# Altium PCB T_module.PcbDoc
Units mm, origin at the board's own origin, x right, y up, seen from the top; angles counter-clockwise.
Board outline 22 x 28 mm, 4 copper layers (Top Layer, Internal Plane 1, Internal Plane 2, Bottom Layer), stack 0.682 mm thick; 25 components, 30 nets, 170 pads, 112 vias.
Unrouted connection lines stored in the file: 35.
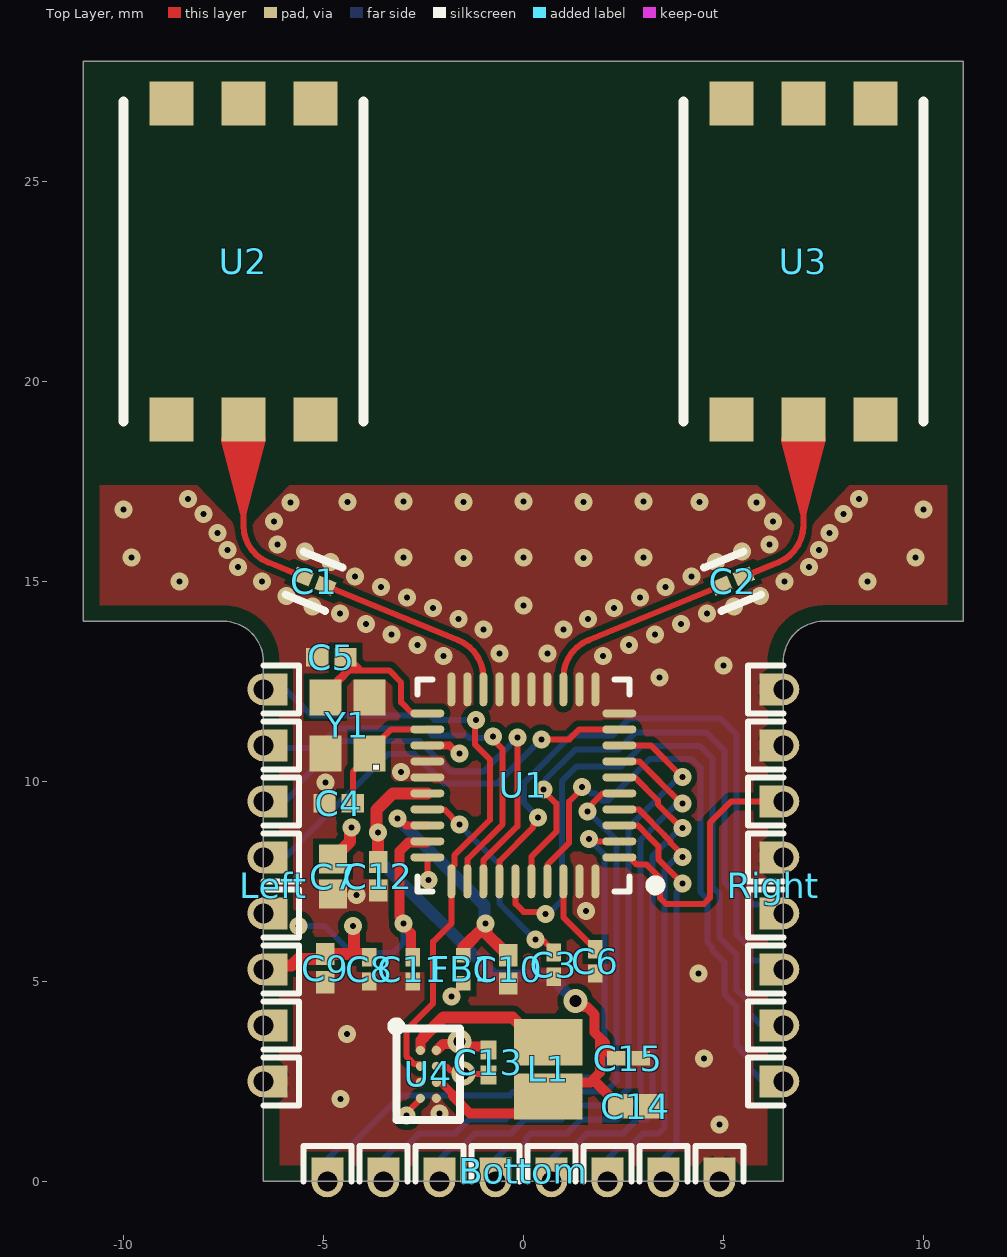
[diagram p0: Top Layer view]
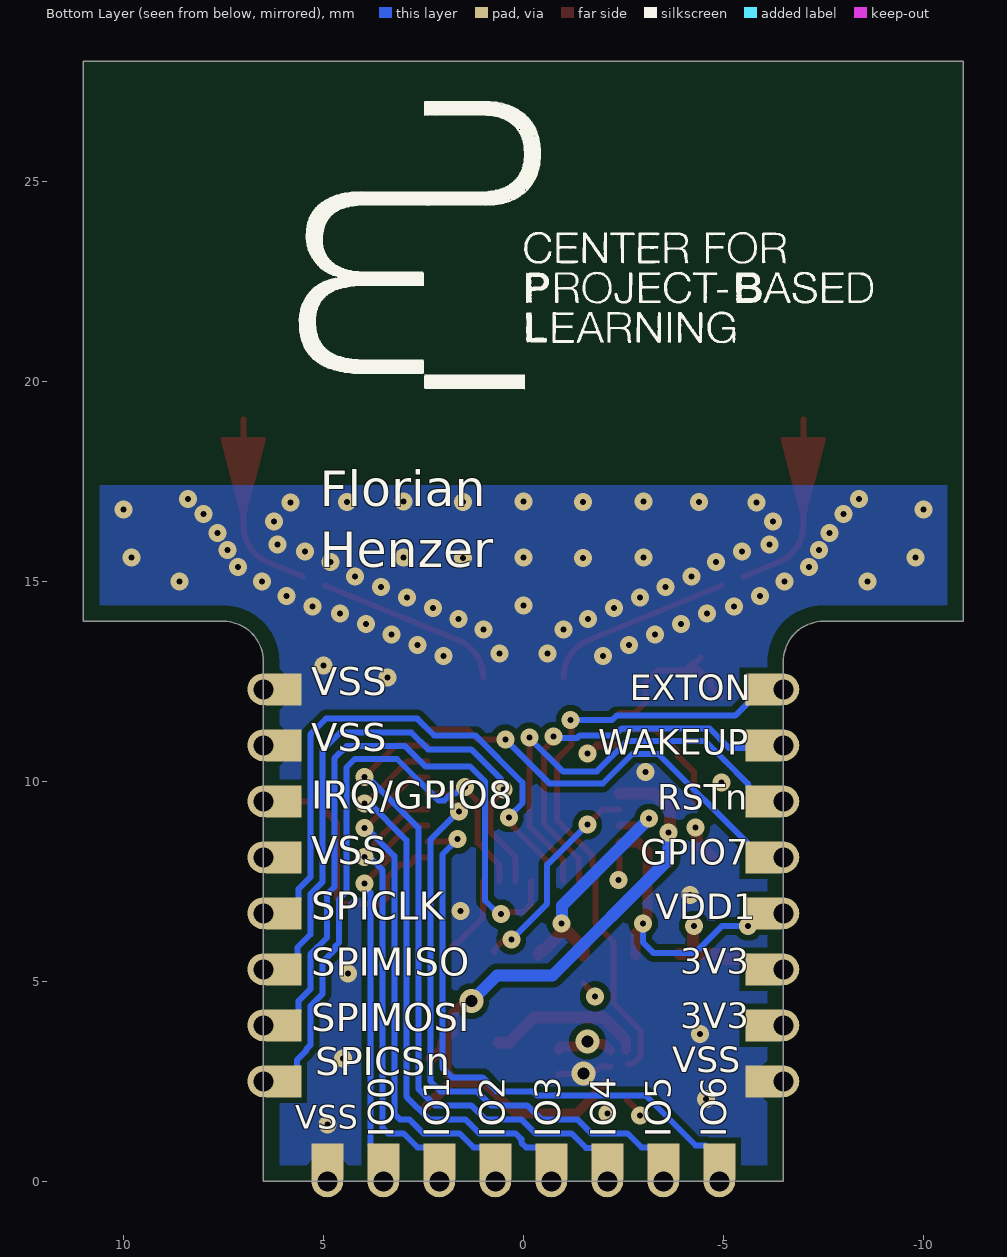
[diagram p1: Bottom Layer view, seen from below]
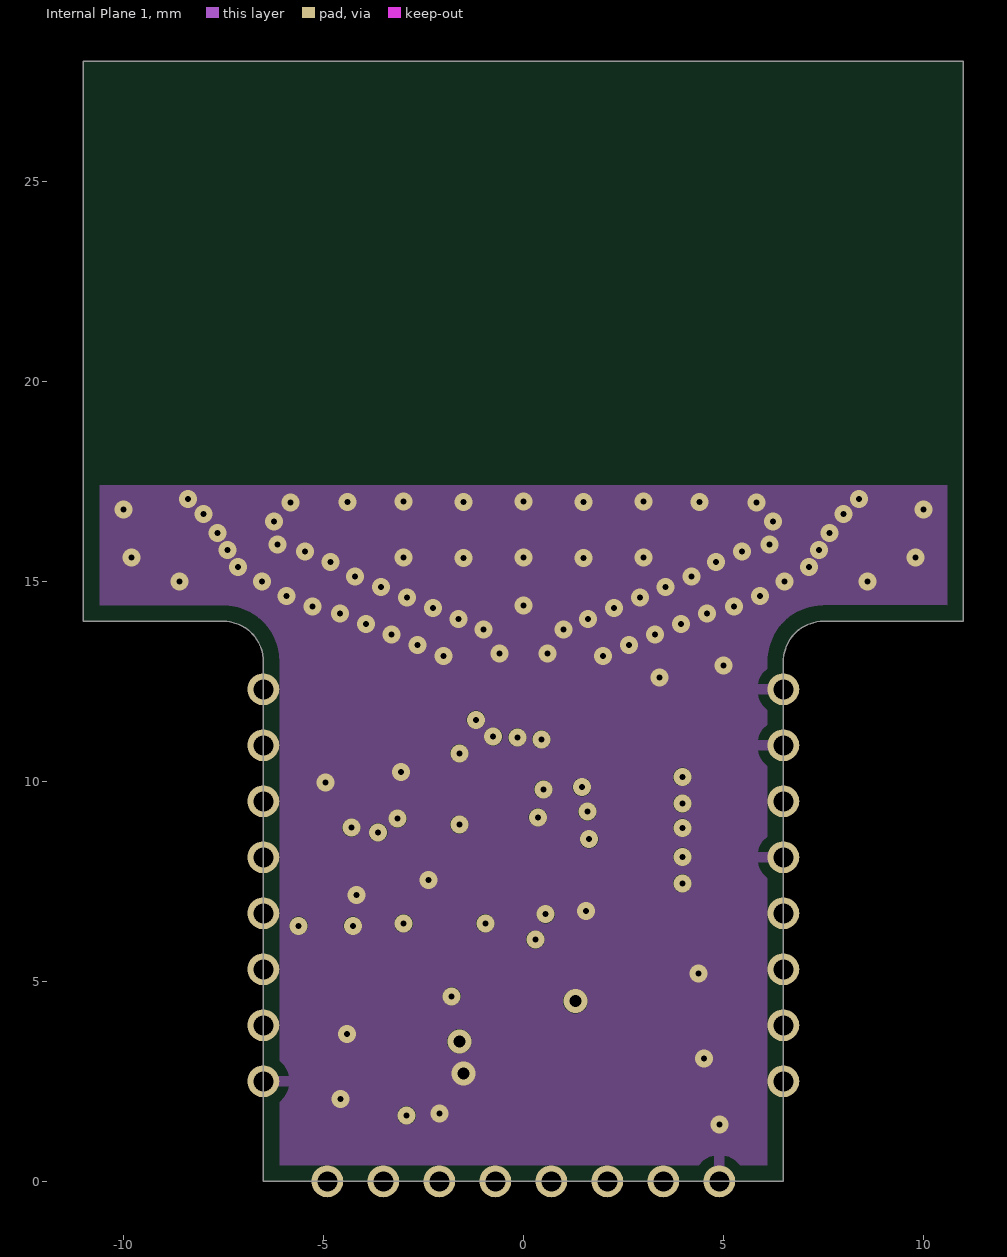
[diagram p2: Internal Plane 1]
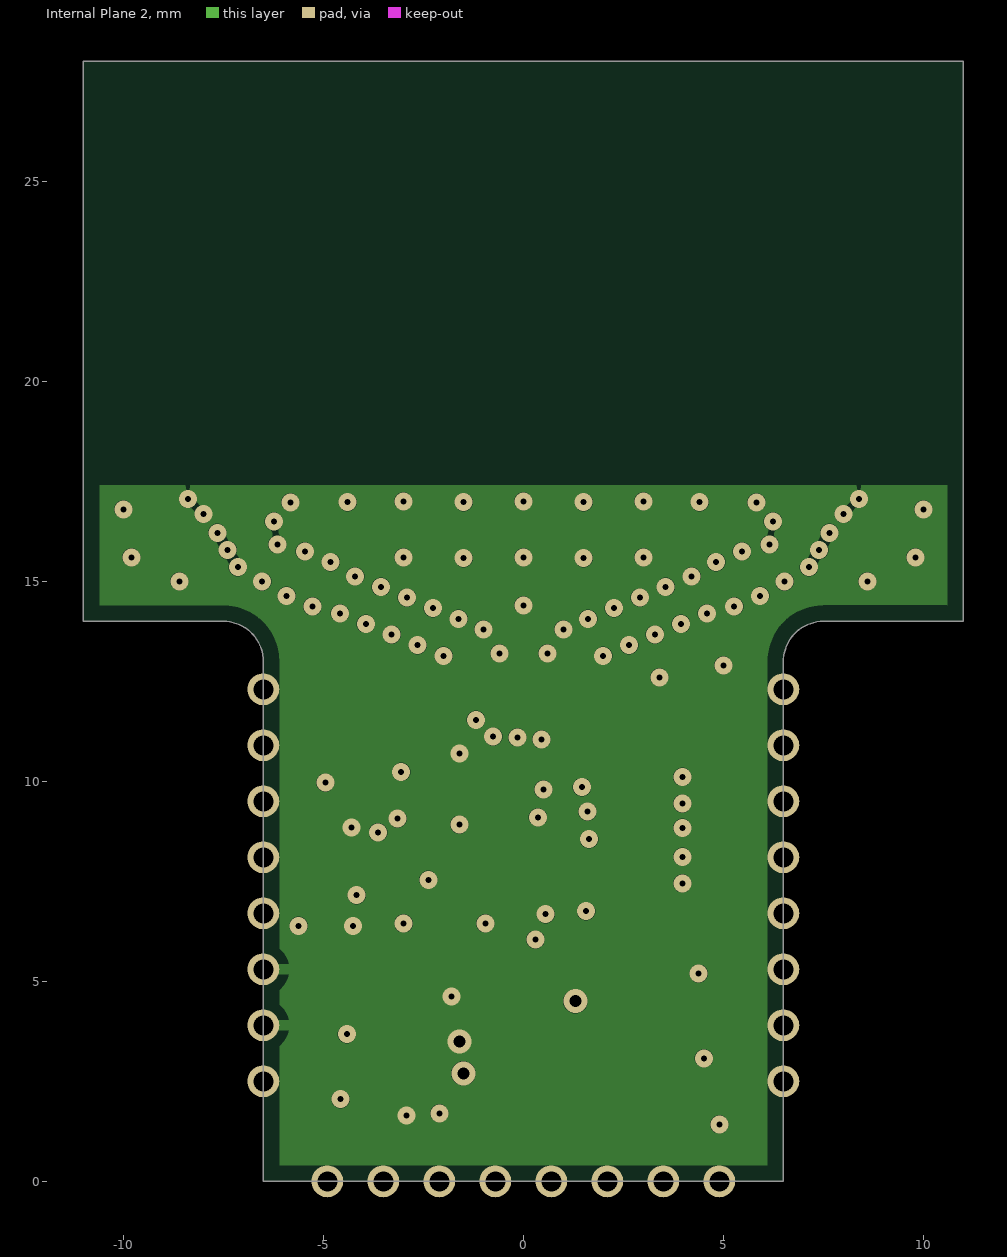
[diagram p3: Internal Plane 2]
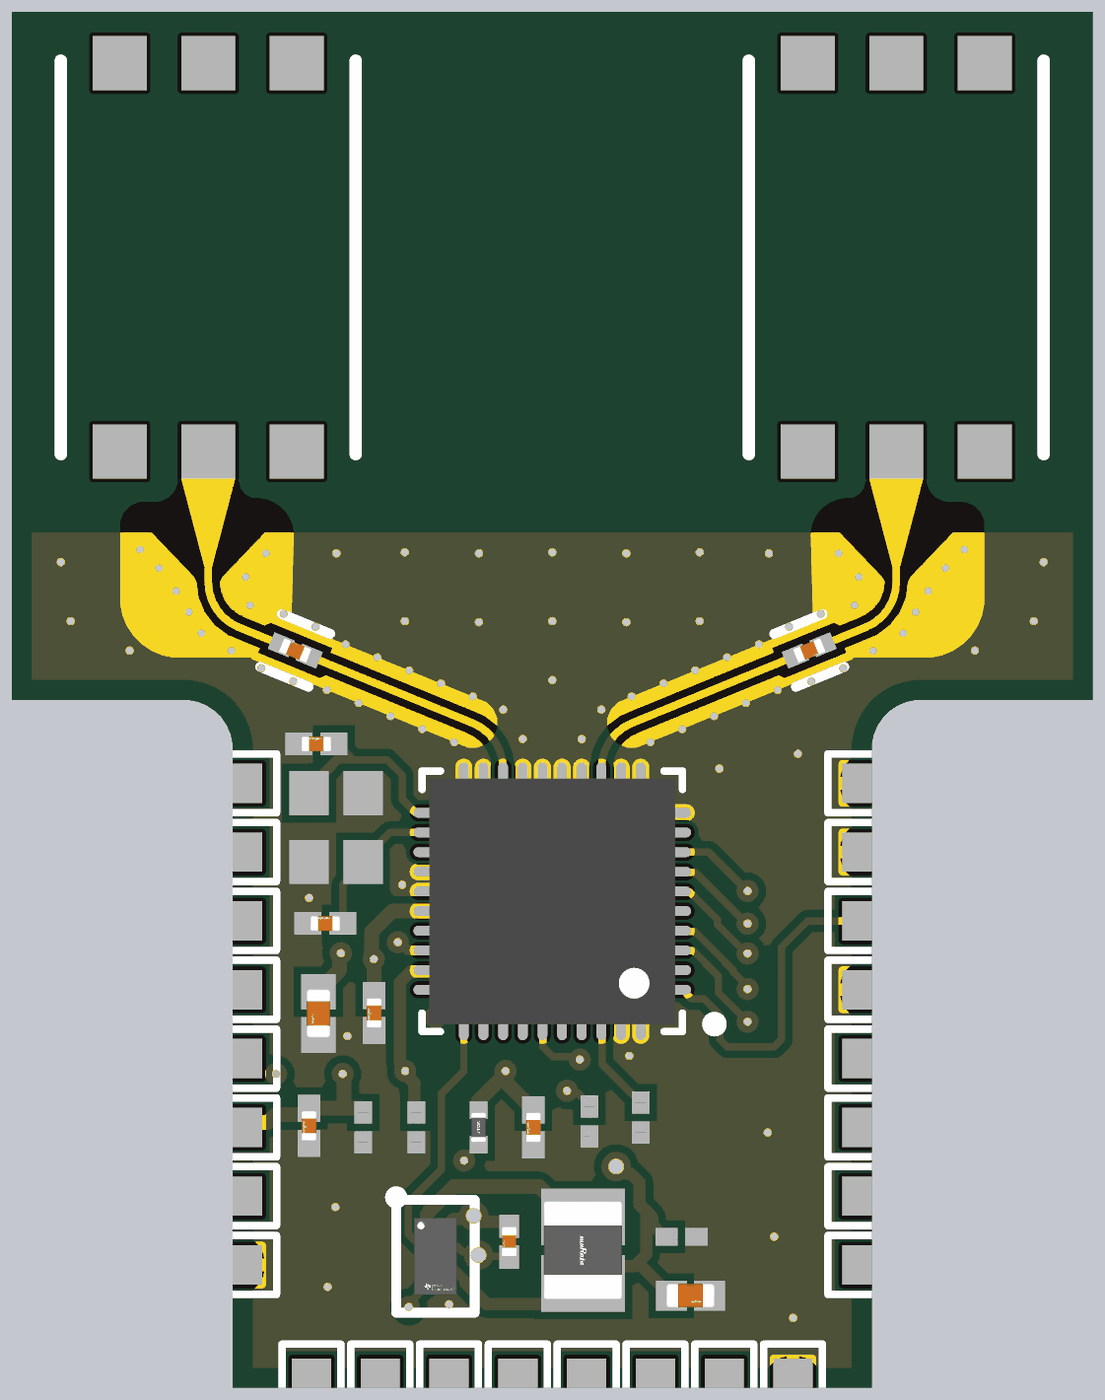
[diagram p4: 3D render of the assembled board from above, using the file's embedded part models]

## Layer stack, top to bottom
Top Solder: solder mask 0.0102, Solder Resist, Dk 3.5
Top Layer: signal copper 0.0356
Dielectric 1: dielectric 0.11, FR-4, Dk 4.65
Internal Plane 1: signal copper 0.0356
Dielectric2: dielectric 0.32, FR-4, Dk 4.65
Internal Plane 2: signal copper 0.0356
Dielectric3: dielectric 0.11, FR-4, Dk 4.65
Bottom Layer: signal copper 0.0356
Bottom Solder: solder mask 0.0102, Solder Resist, Dk 3.5

## Board outline
-6.5,13 ccw(c-7.5,13) -7.5,14 -11,14 -11,28 11,28 11,14 7.5,14 ccw(c7.5,13) 6.5,13 6.5,0 -6.5,0

## Design rules (kind name [scope] priority, off if disabled: settings)
BoardOutlineClearance [All] p1: gap=0 ignorepadtopadclearanceinfootprint=FALSE except(0.4: Poly-OutlineEdge)
Clearance [All] p1: gap=0.15 ignorepadtopadclearanceinfootprint=FALSE
HoleSize [All] p1: absolutevalues=TRUE maxlimit=2.54 minlimit=0.15 maxpercent=80.000 minpercent=20.000
MinimumSolderMaskSliver [All] p1: minsoldermaskwidth=0.1
PlaneClearance [All] p1: clearance=0.25
PlaneConnect PlaneConnect_1 [All] p1: planeconnectstyle=Direct reliefexpansion=0.508 reliefentries=4 reliefconductorwidth=0.254 reliefairgap=0.254
PolygonConnect PolygonConnect_1 [All] p1: thpad.connectstyle=Relief thpad.reliefconductorwidth=0.254 thpad.reliefentries=4 thpad.polygonreliefangle="90 Angle" thpad.airgapwidth=0.254 smdpad.connectstyle=Direct smdpad.reliefconductorwidth=0.254 smdpad.reliefentries=4 smdpad.polygonreliefangle="90 Angle" smdpad.airgapwidth=0.254 via.connectstyle=Direct via.reliefconductorwidth=0.254 via.reliefentries=4 via.polygonreliefangle="90 Angle" via.airgapwidth=0.254
RoutingVias RoutingVias_Power [(InNet('AVDD') OR InNet('GND') OR InNet('VDD') OR InNet('VCOM') OR InNet('EN_VDD3') OR InNet('VDD3') OR InNet('AVDD'))] p1: holewidth=0.3 width=0.6 viastyle="Through Hole" minholewidth=0.15 minwidth=0.45 maxholewidth=0.4 maxwidth=0.8
RoutingVias [All] p2: holewidth=0.3 width=0.6 viastyle="Through Hole" minholewidth=0.15 minwidth=0.45 maxholewidth=1 maxwidth=1.6
SilkToSilkClearance [All] p1: silktosilkclearance=0.01
SilkToSolderMaskClearance [IsPad] p1: minsilkscreentomaskgap=0.01 clearancetoexposedcopper=TRUE
SolderMaskExpansion SolderMaskExpansion_1 [IsVia] p1: expansion=0.102 istentingtop=TRUE
SolderMaskExpansion [All] p2: expansion=0.075 istentingtop=FALSE
Width RF [InNetClass('RF')] p1: maxlimit=0.2 minlimit=0.106 preferedwidth=0.153 // RF Impedance
Width Width_Power [(InNet('AVDD') OR InNet('GND') OR InNet('VDD') OR InNet('VCOM') OR InNet('EN_VDD3') OR InNet('VDD3') OR InNet('AVDD'))] p2: maxlimit=0.4 minlimit=0.2 preferedwidth=0.35
Width [All] p3: maxlimit=0.3 minlimit=0.1 preferedwidth=0.15
24 further rules are at their usual default settings.

## Classes and differential pairs
net class RF: NetC1_1 NetC1_2 NetC2_1 NetC2_2

## Components (designator, comment, footprint, x,y, rotation, side; value= is the part's Value field where it differs from the comment)
Bottom "Casellated Holes" "8 CASTELTED HOLES" -4.9,0 r0 top locked
C1 "GJM0335C1E2R0WB01D" FP-GJM033-0_03-IPC_B -5.23,15.004 r157.72 top locked
C2 "GJM0335C1E2R0WB01D" FP-GJM033-0_03-IPC_B 5.23,15.004 r22.28 top locked
C3 "CL03A224KQ3NNNC" FP-CL03-IPC_B 0.755,5.418 r270 top locked
C4 "GRM0335C1H3R3CA01D" FP-GRM033-0_03-IPC_A -4.619,9.449 r180 top locked
C5 "GRM0335C1H3R3CA01D" FP-GRM033-0_03-IPC_A -4.8,13.1 r180 top locked
C6 "CL03A104KQ3NNNH" FP-CL03-IPC_B 1.8,5.5 r90 top locked
C7 "GRM155R60J106ME47D" FP-GRM155-0_2-0_1-IPC_B -4.757,7.619 r270 top locked
C8 "CL03A104KQ3NNNH" FP-CL03-IPC_B -3.85,5.3 r90 top locked
C9 "GRM033R71A472KA01D" FP-GRM033-0_03-IPC_A -4.95,5.331 r270 top locked
C10 "GRM033R71A472KA01D" FP-GRM033-0_03-IPC_A -0.383,5.3 r270 top locked
C11 "CL03A104KQ3NNNH" FP-CL03-IPC_B -2.767,5.3 r270 top locked
C12 "GRM033R71A472KA01D" FP-GRM033-0_03-IPC_A -3.624,7.627 r270 top locked
C13 "GRM035R60J475ME15D" FP-GRM035-0_09-IPC_B -0.876,2.976 r270 top locked
C14 "GRM155R60J106ME47D" FP-GRM155-0_2-0_1-IPC_C 2.813,1.876 r0 top locked
C15 "CL03A104KQ3NNNH" FP-CL03-IPC_B 2.628,3.076 r180 top locked
FB1 "MPZ0603S330HT000" FP-MPZ0603-IPC_B -1.5,5.3 r90 top locked
L1 "1285AS-H-2R2M=P2" FP-DFE201610C-IPC_C 0.624,2.8 r270 top locked
Left "Casellated Holes" "8 Castelted holes" -6.5,12.3 r270 top locked
Right "Casellated Holes" "8 CASTELTED HOLES" 6.5,2.5 r90 top locked
U1 "DW3220" QFN40P500X500X40_HS-40N 0,9.9 r180 top locked
U2 "AH086M555003-T" AH086M -7,23 r0 top locked
U3 "AH086M555003-T" AH086M 7,23 r0 top locked
U4 "TPS62743YFPR" FP-YFP0008-C01-MFG -2.376,2.676 r0 top locked
Y1 "8Y38472012/10492148" "OSCSC320X250X100N - SMALL FOOTPRINT" -4.4,11.4 r90 top locked

## Footprints (in the part's own frame and the unit in brackets; to place one, negate y for a bottom-side part, rotate by r counter-clockwise, add the part's x,y. Pads: shape width x height; smd on the part's side, far side on the other; paste and mask are expansions set on the pad)
"8 CASTELTED HOLES" [mm]
  round 0.8 hole 0.5: 0(0,0) 1(1.4,0) 2(2.8,0) 3(4.2,0) 4(5.6,0) 5(7,0) 6(8.4,0) 7(9.8,0)
  rect 0.8x0.6 smd: 0(0,0.3) 1(1.4,0.3) 2(2.8,0.3) 3(4.2,0.3) 4(5.6,0.3) 5(7,0.3) 6(8.4,0.3) 7(9.8,0.3)
  rect 0.8x0.9 smd far side: 0(0,0.5) 1(1.4,0.5) 2(2.8,0.5) 3(4.2,0.5) 4(5.6,0.5) 5(7,0.5) 6(8.4,0.5) 7(9.8,0.5)
  silkscreen extent -0.6,0 10.4,0.89
"8 Castelted holes" [mm]
  rect 0.8x0.9 smd far side: 0(0,0.5) 1(1.4,0.5) 2(2.8,0.5) 3(4.2,0.5) 4(5.6,0.5) 5(7,0.5) 6(8.4,0.5) 7(9.8,0.5)
  rect 0.8x0.6 smd: 0(0,0.3) 1(1.4,0.3) 2(2.8,0.3) 3(4.2,0.3) 4(5.6,0.3) 5(7,0.3) 6(8.4,0.3) 7(9.8,0.3)
  round 0.8 hole 0.5: 0(0,0) 1(1.4,0) 2(2.8,0) 3(4.2,0) 4(5.6,0) 5(7,0) 6(8.4,0) 7(9.8,0)
  silkscreen extent -0.6,0 10.4,0.89
AH086M [mm] "RF ANT CHIP SLD"
  rect 1.1x1.1 smd: 1(0,-3.95) ""(-1.8,-3.95) ""(-1.8,3.95) ""(0,3.95) ""(1.8,-3.95) ""(1.8,3.95)
  silkscreen extent -3,-4 3,4, body extent -3,-4 3,4, height 1
FP-CL03-IPC_B [mm]
  rect 0.454x0.363 smd paste+0 mask+0: 1(-0.304,0) 2(0.304,0)
  body extent -0.68,-0.33 0.68,0.33, height 0.25
FP-DFE201610C-IPC_C [mm]
  rect 1.154x1.706 smd paste+0 mask+0: 1(-0.676,0) 2(0.676,0)
  body extent -1.35,-1 1.35,1, height 0.25
FP-GJM033-0_03-IPC_B [mm]
  rect 0.454x0.363 smd paste+0 mask+0: 1(-0.304,0) 2(0.304,0)
  silkscreen extent -0.53,-0.58 0.53,0.58, body extent -0.68,-0.33 0.68,0.33, height 0.25
FP-GRM033-0_03-IPC_A [mm]
  rect 0.554x0.463 smd paste+0 mask+0: 1(-0.354,0) 2(0.354,0)
  body extent -0.83,-0.43 0.83,0.43, height 0.25
FP-GRM035-0_09-IPC_B [mm]
  rect 0.477x0.403 smd paste+0 mask+0: 1(-0.313,0) 2(0.313,0)
  body extent -0.7,-0.35 0.7,0.35, height 0.25
FP-GRM155-0_2-0_1-IPC_B [mm]
  rect 0.728x0.706 smd paste+0 mask+0: 1(-0.439,0) 2(0.439,0)
  body extent -0.95,-0.5 0.95,0.5, height 0.25
FP-GRM155-0_2-0_1-IPC_C [mm]
  rect 0.628x0.606 smd paste+0 mask+0: 1(-0.389,0) 2(0.389,0)
  body extent -0.8,-0.45 0.8,0.45, height 0.25
FP-MPZ0603-IPC_B [mm]
  rect 0.363x0.363 smd paste+0 mask+0: 1(-0.35,0) 2(0.35,0)
  body extent -0.68,-0.33 0.68,0.33, height 0.25
FP-YFP0008-C01-MFG [mm]
  round 0.23 smd paste-1000 mask+0: A1(-0.2,0.6) A2(0.2,0.6) B1(-0.2,0.2) B2(0.2,0.2) C1(-0.2,-0.2) C2(0.2,-0.2) D1(-0.2,-0.6) D2(0.2,-0.6)
  silkscreen extent -0.9,-1.15 0.8,1.3, body extent -0.95,-1.3 0.95,1.3, height 0.25
"OSCSC320X250X100N - SMALL FOOTPRINT" [mm]
  rect 0.9x0.8 smd mask+0: 1(-0.7,-0.55) 2(0.7,-0.55) 3(0.7,0.55) 4(-0.7,0.55)
  body extent -1,-0.8 1,0.8, height 0.5
QFN40P500X500X40_HS-40N [mm] "QFN, 40-Leads, Body 5x5mm, Pitch 0.4mm, IPC Medium Density"
  oval 0.85x0.2 smd: 1(-2.4,1.8) 2(-2.4,1.4) 3(-2.4,1) 4(-2.4,0.6) 5(-2.4,0.2) 6(-2.4,-0.2) 7(-2.4,-0.6) 8(-2.4,-1) 9(-2.4,-1.4) 10(-2.4,-1.8) 21(2.4,-1.8) 22(2.4,-1.4) 23(2.4,-1) 24(2.4,-0.6) 25(2.4,-0.2) 26(2.4,0.2) 27(2.4,0.6) 28(2.4,1) 29(2.4,1.4) 30(2.4,1.8)
  oval 0.2x0.85 smd: 11(-1.8,-2.4) 12(-1.4,-2.4) 13(-1,-2.4) 14(-0.6,-2.4) 15(-0.2,-2.4) 16(0.2,-2.4) 17(0.6,-2.4) 18(1,-2.4) 19(1.4,-2.4) 20(1.8,-2.4) 31(1.8,2.4) 32(1.4,2.4) 33(1,2.4) 34(0.6,2.4) 35(0.2,2.4) 36(-0.2,2.4) 37(-0.6,2.4) 38(-1,2.4) 39(-1.4,2.4) 40(-1.8,2.4)
  silkscreen extent -3.43,-2.65 2.65,2.65, body extent -2.5,-2.5 2.5,2.5, height 0.5

## Part data
C1 C2: library part CMP-2010-00751-2, "Ceramic Capacitor 2pF ±0.05pF 25V C0G 0201 (0603 Metric)", Capacitance=2pF, Case Code (Imperial)=0201, Case Code (Metric)=0603, Dielectric=C0G, Max Operating Temperature=125°C, Min Operating Temperature=-55°C, Package Quantity=15000, Voltage Rating=25V, Case/Package=0201, Depth=0.3mm, Height=0.3mm, Length=0.6mm, Mount="Surface Mount", Packaging="Tape and Reel", Radiation Hardening=No, Termination=SMD/SMT, Thickness=0.013inch, Voltage Rating (DC)=25V, Width=0.012inch
C3: library part CMP-2010-00678-2, "Cap Ceramic 220nF 6.3V X5R ±10% Pad SMD 0201 +85°C T/R", Capacitance=220nF, Case Code (Imperial)=0201, Case Code (Metric)=0603, Dielectric=X5R, Max Operating Temperature=85°C, Min Operating Temperature=-55°C, Tolerance=10%, Voltage Rating=6.3V, Case/Package=0201, Contact Plating=Tin, Depth=0.3mm, Height=0.3mm, Length=0.6mm, Mount="Surface Mount", Packaging="Tape and Reel", Radiation Hardening=No, Thickness=0.013inch, Width=0.012inch
C4 C5: library part CMP-2010-01116-2, "Chip Multilayer Ceramic Capacitors for General Purpose, 0201, 3.3pF, C0G, 30ppm/°C, 0.25pF, 50V", Capacitance=3.3pF, Case Code (Imperial)=0201, Case Code (Metric)=0603, Dielectric=C0G, Max Operating Temperature=125°C, Min Operating Temperature=-55°C, Package Quantity=1, Voltage Rating=50V, Case/Package=0201, Depth=0.3mm, Lead Free="Lead Free", Length=0.024inch, Mount="Surface Mount", Packaging="Tape and Reel", Termination=SMD/SMT, Thickness=0.013inch, Voltage Rating (DC)=50V, Width=0.012inch
C6 C8 C11 C15: library part CMP-13271-001518-1, "Cap Ceramic 100nF 6.3V X5R ±10% Pad SMD 0201 +85°C T/R", Capacitance=100nF, Case Code (Imperial)=0201, Case Code (Metric)=0603, Dielectric=X5R, Max Operating Temperature=85°C, Min Operating Temperature=-55°C, Package Quantity=15000, Tolerance=10%, Voltage Rating=6.3V, Case/Package=0201, Depth=0.3mm, Height=0.3mm, Length=0.6mm, Mount="Surface Mount", Packaging="Tape and Reel", Radiation Hardening=No, Thickness=0.013inch, Width=0.012inch
C7 C14: library part CMP-06035-022355-1, "Chip Multilayer Ceramic Capacitors for General Purpose, 0402, 10uF, X5R, 15%, 20%, 6.3V", Capacitance=10uF, Case Code (Imperial)=0402, Case Code (Metric)=1005, Dielectric=X5R, Max Operating Temperature=85°C, Min Operating Temperature=-55°C, Tolerance=20%, Voltage Rating=6.3V, Case/Package=0402, Length=0.039inch, Mount="Surface Mount", Packaging="Tape and Reel", Thickness=0.024inch, Voltage Rating (DC)=6.3V, Width=0.02inch
C9 C10 C12: library part CMP-2010-01686-2, "Chip Multilayer Ceramic Capacitors for General Purpose, 0201, 4700pF, X7R, 15%, 10%, 10V", Capacitance=4.7nF, Case Code (Imperial)=0201, Case Code (Metric)=0603, Dielectric=X7R, Max Operating Temperature=125°C, Min Operating Temperature=-55°C, Package Quantity=1, Tolerance=10%, Voltage=10V, Case/Package=0201, Depth=0.3mm, Height=0.3mm, Lead Free="Lead Free", Length=0.6mm, Material=Ceramic, Mount="Surface Mount", Packaging="Tape and Reel", Radiation Hardening=No, REACH SVHC="No SVHC", Termination=SMD/SMT, Thickness=0.013inch, Voltage Rating=10V, Voltage Rating (DC)=10V, Width=0.012inch
C13: library part CMP-06035-019701-1, "Chip Multilayer Ceramic Capacitors for General Purpose, 0201, 4.7uF, X5R, 15%, 20%, 6.3V", Capacitance=4.7uF, Case Code (Imperial)=0201, Case Code (Metric)=0603, Dielectric=X5R, Max Operating Temperature=85°C, Min Operating Temperature=-55°C, Tolerance=20%, Voltage Rating=6.3V, Case/Package=0201, Length=0.024inch, Mount="Surface Mount", Packaging="Tape and Reel", Thickness=0.022inch, Voltage Rating (DC)=6.3V, Width=0.012inch
FB1: library part CMP-08257-000038-1, "CHIP BEADS FOR GENERAL SIGNAL LI", Case Code (Imperial)=0201, Case Code (Metric)=0603, DC Resistance (DCR)=50mR, Max Current Rating=1.6A, Max Operating Temperature=125°C, Min Operating Temperature=-55°C, Case/Package=0201, Mount="Surface Mount", Number of Lines=1, Packaging="Cut Tape", RoHS Compliant=Yes
L1: library part CMP-06042-000201-1, "Shielded Wirewound Inductor 2.2uH 20% 1200mA 0.204Ω 0806 (2016)", Case Code (Imperial)=0805, Case Code (Metric)=2012, Current Rating=1.5A, DC Resistance (DCR)=204mR, Inductance=2.2uH, Max DC Current=1.2A, Max Operating Temperature=85°C, Min Operating Temperature=-40°C, Resistor Type=Wirewound, Test Frequency=1MHz, Tolerance=20%, Case/Package=0805, Core Material=Ferrite, Depth=1.6mm, Height - Seated (Max)=0.039inch, Length=0.079inch, Mount="Surface Mount", Packaging="Tape and Reel", Shielding=Shielded, Width=0.063inch
U1: library part CMP-01416-1, "Ultra-low power Wi-Fi 802.11b/g/n, without mounted antenna", Manufacturer=Qorvo, Package Type=QFN, Package(mm)="5 x 5", Voltage(V)="2.4 to 3.6", 802.15 Standards="4a, 4z-BPRF", Angle of Arrival(degrees)="< 5", Antenna Ports(#)=2, BOM Ext Components(#)=10, Data Rate="850 kbps, 6.8 Mbps", Interface=SPI, MCU=External, Part # Aliases=DWM3000, PDoA Support=Yes, Product Type="RF Transceiver", Ranging Accuracy(cm)="< 10", Security Features="4z Compliant + AES", Series=DWM3000, Subcategory="Wireless & RF Integrated Circuits", UWB Channels="5, 9"
U2 U3: library part CMP-00997-1, "3.5GHz, 5.6GHz WiMax™ Chip RF Antenna 3.1GHz ~ 8GHz 2.6dBi, 0.7dBi Solder Surface Mount", Frequency=5.55GHz, Max Frequency=8GHz, Max Operating Temperature=80°C, Min Operating Temperature=-20°C, Package Quantity=1, Height=0.039inch, Impedance=50R, Length=8mm, Mount="Surface Mount", Number of Bands=1, Packaging="Tape and Reel", Radiation Hardening=No, REACH SVHC=Unknown, Termination=Solder, Width=6mm
U4: library part CMP-04918-000507-1, "IC REG BUCK PROG 300MA 8DSBGA", Max Input Voltage=5.5V, Max Operating Temperature=85°C, Max Output Voltage=3.3V, Min Input Voltage=2.15V, Min Operating Temperature=-40°C, Min Output Voltage=1.2V, Output Current=300mA, Quiescent Current=300nA, Switching Frequency=1.2MHz, Lead Free="Lead Free", Mount="Surface Mount", Number of Outputs=1, Output Configuration=Positive, Packaging="Tape and Reel", RoHS Compliant=Yes, Synchronous Rectifier=Yes
Y1: library part ABM8G-14.31818MHZ-B4Y-T, "Crystal 20MHz Ã‚Â±20ppm (Tol) Ã‚Â±30ppm (Stability) 18pF FUND 80Ohm 4-Pin Mini-CSMD T/R / https://www.digikey.ch/de/products/detail/txc-corporation/8Y38472012/10492148", Package=None, Availability=Unavailable, MP=8Y38472012/10492148, Price=None

## Via types
v1: diameter 0.45, hole 0.15, Top Layer to Bottom Layer, tented both sides, 109 vias
v2: diameter 0.6, hole 0.3, Top Layer to Bottom Layer, tented both sides, 3 vias

## Nets (pads, with @x,y where several pads share a name; then routed paths per layer and width w, separated by ;. In a path a pad name is that pad's centre, name@x,y a point inside that pad or via, vN(x,y) a via of type N, cw(c..) or ccw(c..) an arc to the next point about the centre after c; other vN are vias at no path point)
3V3: C7.1 C8.2 C9.1 C13.1 FB1.1 Left.5 Left.6 U1.23 U4.A2 U4.D1 | length 7.9
  Top Layer w0.15: v1(-2.92,1.648) -2.92,1.711 -2.576,2.054 U4.D1 ; v1(-1.793,4.625) -1.793,4.657 FB1.1
  Top Layer w0.2: U1.23 -2.075,10.9 -2.065,10.89 -1.842,10.89 -1.652,10.7 v1(-1.6,10.7)
  Top Layer w0.25: U4.A2@-2.168,3.276 -2.005,3.439 -1.761,3.439 -1.757,3.443 -1.657,3.443 v2(-1.6,3.5) ; v2@-1.6,3.6 -1.6,3.581 -1.396,3.378 -0.928,3.378 -0.876,3.326 C13.1
  Top Layer w0.3: Left.5@-6.5,5.3 -6.404,5.396 -5.794,5.396 -5.631,5.559 -5.031,5.559 -4.948,5.642 -4.948,5.688 -4.236,5.688 ; C7.1 -4.757,8.069 -4.33,8.496 -4.33,8.814 v1(-4.301,8.843) ; v1(-4.264,6.388) -4.236,6.359 -4.236,5.688 ; C8.2@-3.906,5.688 -4.236,5.688
EXTON: Left.0 U1.31 U4.B1 | length 15.5
  Top Layer w0.15: U4.B1@-2.603,2.93 -2.725,2.93 -2.823,3.028 -2.926,3.131 -2.926,3.778 -2.253,4.45 -2.253,5.992 -1.8,6.445 U1.31 -1.8,7.839 -1.725,7.914 -1.725,8.15 -0.84,9.035 -0.84,10.552 -1.204,10.917 -1.204,11.518 v1(-1.184,11.537)
  Bottom Layer w0.15: Left.0@-6.5,12.3 -6,12.3 -5.95,12.3 -5.295,11.645 -2.327,11.645 -2.219,11.537 v1(-1.184,11.537)
GPIO0: Bottom.6 U1.3 | length 10
  Top Layer w0.15: U1.3 2.41,8.89 2.869,8.89 3.126,8.633 3.126,8.626 3.384,8.369 3.384,8.04 v1(3.975,7.449)
  Bottom Layer w0.15: Bottom.6@3.5,0 3.5,0.55 3.825,0.875 3.825,7.218 3.975,7.368 v1(3.975,7.449)
GPIO1: Bottom.5 U1.4 | length 11.4
  Top Layer w0.15: U1.4 2.41,9.29 2.893,9.29 3.525,8.659 3.525,8.652 3.684,8.493 3.684,8.459 3.904,8.239 3.974,8.239 v1@3.975,8.24
  Bottom Layer w0.15: Bottom.5@2.1,0 2.1,0.55 2.4,0.85 2.646,0.85 2.996,1.2 3.389,1.2 3.525,1.336 3.525,7.79 v1@3.975,8.24
  other v1: 3.975,8.114
GPIO2: Bottom.4 U1.6 | length 13.2
  Top Layer w0.15: U1.6 2.41,10.09 2.794,10.09 3.363,9.522 3.363,9.421 3.945,8.838 v1(3.975,8.838)
  Bottom Layer w0.15: Bottom.4@0.7,0 0.7,0.55 1,0.85 1.246,0.85 1.596,1.2 2.501,1.2 2.851,1.55 3.089,1.55 3.225,1.686 3.225,8.131 3.933,8.838 v1(3.975,8.838)
GPIO3: Bottom.3 U1.7 | length 14.6
  Top Layer w0.15: U1.7 2.41,10.49 2.909,10.49 3.41,9.989 3.41,9.984 v1@3.894,9.5
  Bottom Layer w0.15: Bottom.3@-0.7,0 -0.7,0.55 -0.4,0.85 -0.067,0.85 0.05,0.967 0.05,1.054 0.196,1.2 1.101,1.2 1.451,1.55 2.357,1.55 2.925,2.118 2.925,8.53 v1@3.895,9.5
  other v1: 3.975,9.445
GPIO4: Bottom.2 U1.8 | length 16.3
  Top Layer w0.15: U1.8 3.185,10.9 v1(3.975,10.11)
  Bottom Layer w0.15: Bottom.2@-2.1,0 -2.1,0.539 -1.8,0.839 -1.565,0.839 -1.204,1.2 -0.299,1.2 0.051,1.55 0.957,1.55 1.306,1.9 2.212,1.9 2.625,2.313 2.625,8.841 3.766,9.982 3.894,10.11 v1(3.975,10.11)
GPIO5: Bottom.1 U1.5 | length 15.3
  Top Layer w0.15: v1(1.603,9.243) 1.603,9.318 1.733,9.447 1.733,9.452 1.98,9.7 U1.5
  Bottom Layer w0.15: Bottom.1@-3.5,0 -3.5,0.55 -3.2,0.85 -2.954,0.85 -2.604,1.2 -1.699,1.2 -1.349,1.55 -0.443,1.55 -0.093,1.9 0.812,1.9 1.162,2.25 2.067,2.25 2.325,2.508 2.325,8.544 1.626,9.243 v1(1.603,9.243)
GPIO6: Bottom.0 U1.2 | length 15.4
  Top Layer w0.15: v1(1.643,8.554) 1.71,8.554 1.765,8.5 U1.2
  Bottom Layer w0.15: Bottom.0@-4.9,0 -4.675,0.225 -4.675,0.5 -4.9,0.5 -4.9,0.55 -4.55,0.9 -4.304,0.9 -3.054,2.15 -0.338,2.15 -0.238,2.25 0.667,2.25 1.017,2.6 1.783,2.6 2.025,2.842 2.025,8.172 v1(1.643,8.554)
GPIO7: Left.3 U1.9 | length 10.8
  Top Layer w0.15: v1(0.451,11.049) 1.148,11.049 1.399,11.3 U1.9
  Bottom Layer w0.15: Left.3@-6.5,8.1 -5.95,8.1 -5.625,8.425 -5.625,8.436 -3.376,10.685 -2.725,10.685 -1.99,9.95 -0.648,9.95 v1(0.451,11.049)
IRQ/GPIO8: Right.5 U1.1 | length 7.1
  Top Layer w0.15: U1.1 2.711,8.1 2.735,8.077 2.735,8.019 2.838,7.916 3.084,7.916 3.41,7.59 3.41,7.09 3.56,6.94 4.515,6.94 4.663,7.087 4.663,8.963 5.2,9.5 6.2,9.5 Right.5@6.5,9.5
NetC1_1: C1.1 U1.18 | length 4.8
  Top Layer w0.154: C1.1@-4.952,14.89 C1.1 -1.621,13.525 cw(c-2,12.6) U1.18@-1,12.6
NetC1_2: C1.2 U2.1 | length 4.8
  Top Layer w0.154: U2.1 -7,16.4 ccw(c-6,16.4) -6.379,15.475 C1.2@-5.511,15.119
NetC2_1: C2.1 U1.13 | length 4.8
  Top Layer w0.154: U1.13@1,12.6 cw(c2,12.6) 1.621,13.525 C2.1 C2.1@4.952,14.89
NetC2_2: C2.2 U3.1 | length 4.8
  Top Layer w0.154: C2.2 6.379,15.475 ccw(c6,16.4) 7,16.4 U3.1
NetC3_1: C3.1 U1.27 | length 5.2
  Top Layer w0.15: U1.27 -1.98,9.3 v1(-1.6,8.92) ; v1(0.301,6.045) 0.349,5.997 0.526,5.997 0.721,5.802 C3.1@0.721,5.722
  Bottom Layer w0.15: v1(-1.6,8.92) -0.596,7.916 -0.596,6.942 v1(0.301,6.045)
NetC6_2: C6.2 U1.38 | length 2.1
  Top Layer w0.15: U1.38 1.01,7.49 1.01,6.595 1.648,5.956 1.694,5.956 1.8,5.85 C6.2
NetC10_1: C10.1 FB1.2 U1.28 | length 6.4
  Top Layer w0.2: v1(-3.141,9.068) -3.1,9.068 -2.932,8.9 U1.28
  Top Layer w0.3: -1.508,5.833 -0.952,6.388 v1(-0.952,6.447) ; FB1.2 FB1.2@-1.5,5.825 ; v1@-0.927,6.447 -0.923,6.444 -0.923,6.194 -0.51,5.781 -0.465,5.781 -0.383,5.7 C10.1
  Bottom Layer w0.3: v1(-3.141,9.068) -0.971,6.897 -0.971,6.466 v1(-0.952,6.447)
NetL1_1: L1.1 U4.A1 | length 3.8
  Top Layer w0.25: U4.A1@-2.57,3.282 -2.57,3.53
  Top Layer w0.3: -2.5,3.6 -2,4.1 -0.276,4.1 0.348,3.476 L1.1
RSTn: Left.2 U1.33 | length 11.6
  Top Layer w0.15: U1.33@-1,7.511 -0.99,7.521 -0.99,8.036 -0.151,8.875 v1(-0.151,11.097)
  Bottom Layer w0.15: Left.2@-6.5,9.5 -5.95,9.5 -5.625,9.825 -5.625,9.898 -5.611,9.913 -5.611,9.944 -5.015,10.54 -4.55,11.005 -2.592,11.005 -1.837,10.25 -0.987,10.25 -0.151,11.085 v1(-0.151,11.097)
SPICLK: Right.3 U1.34 | length 14.4
  Top Layer w0.15: U1.34@-0.594,7.506 -0.594,8.008 0.246,8.848 0.246,8.902 0.363,9.019 v1(0.363,9.1)
  Bottom Layer w0.15: v1(0.363,9.1) 0.363,9.112 0.021,9.455 0.021,9.968 1.203,11.15 2.234,11.15 2.651,11.567 4.933,11.567 5.325,11.175 5.325,7.607 5.625,7.307 5.625,7.025 5.725,6.925 6.275,6.925 Right.3@6.5,6.7
SPICSn: Right.0 U1.37 | length 15.7
  Top Layer w0.15: U1.37 0.6,7.92 1.143,8.463 1.143,9.498 1.464,9.818 v1(1.464,9.856)
  Bottom Layer w0.15: v1(1.464,9.856) 1.54,9.856 1.693,9.703 1.794,9.703 1.972,9.525 2.125,9.525 3.16,10.56 4.213,10.56 4.425,10.348 4.425,7.234 4.608,7.051 4.608,5.967 4.711,5.865 4.711,5.794 5.025,5.48 5.025,4.683 5.325,4.383 5.325,3.407 5.417,3.315 5.417,3.279 5.664,3.032 5.664,2.825 5.989,2.5 6.5,2.5 Right.0@6.275,2.725
SPIMISO: Right.2 U1.36 | length 14.5
  Top Layer w0.15: U1.36 0.2,8.12 0.823,8.743 0.823,9.442 0.5,9.765 v1(0.5,9.797)
  Bottom Layer w0.15: v1(0.5,9.797) 0.554,9.851 0.554,10.048 1.305,10.8 2.379,10.8 2.796,11.217 4.583,11.217 5.025,10.775 5.025,7.483 5.325,7.183 5.325,6.171 5.65,5.846 5.65,5.6 5.725,5.525 6.275,5.525 Right.2@6.5,5.3
SPIMOSI: Right.1 U1.35 | length 16.9
  Top Layer w0.15: U1.35 -0.194,7.494 -0.194,6.94 0.008,6.737 0.502,6.737 v1(0.56,6.68)
  Bottom Layer w0.15: v1(0.56,6.68) 0.618,6.68 0.96,7.022 0.96,10.002 1.333,10.375 2.449,10.375 2.954,10.88 4.42,10.88 4.725,10.575 4.725,7.358 4.908,7.175 4.908,6.092 5.325,5.675 5.325,4.807 5.625,4.507 5.625,4.225 5.95,3.9 Right.1@6.5,3.9
VDD1: C11.1 Left.4 U1.29 | length 7
  Top Layer w0.25: C11.1@-2.801,5.647 -2.807,5.653 -2.807,6.206 -2.994,6.393 -2.994,6.501 -3.1,6.607 -3.1,8.255 -2.88,8.475 U1.29@-2.425,8.475
  Bottom Layer w0.15: v1(-5.62,6.388) -4.971,6.388 -4.295,5.712 -3.25,5.712 -2.994,5.968 v1(-2.994,6.447)
VDD3: C12.1 C14.1 C15.2 L1.2 U1.26 U4.C2 | length 18.2
  Top Layer w0.2: U4.C2@-2.17,2.47 -2.054,2.47 -1.765,2.181
  Top Layer w0.25: -1.765,2.133 -1.332,1.7 0.2,1.7 L1.2 0.976,2.476 1.676,2.476 1.676,2.478 1.916,2.719 1.916,3.584 ; v2(1.3,4.503) 1.381,4.503 1.531,4.353 1.601,4.353 1.777,4.177 1.777,3.723 1.916,3.584 ; 1.824,2.465 2.413,1.876 C14.1 ; C15.2 2.278,3.076 2.035,3.319 2.035,3.465 1.916,3.584
  Top Layer w0.3: v1@-3.7,8.8 -3.671,8.829 -3.671,9.288 -3.259,9.7 U1.26 ; v1(-3.632,8.723) -3.628,8.719 -3.628,7.986 C12.1
  Bottom Layer w0.3: v1(-3.632,8.723) -3.628,8.719 -3.628,8.048 -0.731,5.15 0.653,5.15 v2(1.3,4.503)
VSS: Bottom.7 C3.2 C4.2 C5.2 C6.1 C7.2 C8.1 C9.2 C10.2 C11.2 C12.2 C13.2 C14.2 C15.1 Left.7 Right.4 Right.6 Right.7 U1.10 U1.11 U1.12 U1.14 U1.15 U1.16 U1.17 U1.19 U1.20 U1.24 U1.25 U1.30 U1.39 U1.40 U4.B2 U4.C1 U4.D2 Y1.2 Y1.4 | length 2.6
  Top Layer w0.15: U1.30 -2.4,7.562 v1(-2.378,7.539) ; U4.B2 -1.929,2.876 -1.82,2.767 -1.567,2.767 v2(-1.5,2.7) -1.481,2.681 -0.895,2.681 C13.2
  Top Layer w0.3: Left.7@-6.5,2.5 Left.7@-6.2,2.5 ; Bottom.7@4.9,0 Bottom.7@4.9,0.3
  other v1: 4.9,1.423 -2.1,1.7 -4.569,2.054 4.515,3.076 -4.413,3.68 4.383,5.196 1.568,6.754 -4.168,7.156 -4.95,9.968 -3.054,10.235 3.4,12.6 5,12.9 -1.996,13.138 1.996,13.138 -0.6,13.2 0.6,13.2 -2.643,13.404 2.643,13.404 -3.291,13.669 3.291,13.669 -1,13.8 1,13.8 -3.939,13.935 3.939,13.935 -1.616,14.064 1.616,14.064 -4.586,14.2 4.586,14.2 -2.264,14.329 2.264,14.329 -5.272,14.373 5.272,14.373 0,14.4 -2.912,14.595 2.912,14.595 -5.92,14.638 5.92,14.638 -3.56,14.86 3.56,14.86 -8.6,15 -6.53,14.996 6.53,14.996 8.6,15 -4.207,15.125 4.207,15.125 -7.14,15.354 7.14,15.354 -4.817,15.483 4.817,15.483 -1.492,15.579 1.508,15.579 -9.8,15.6 -3,15.6 0,15.6 3,15.6 9.8,15.6 -5.465,15.749 5.465,15.749 -7.396,15.783 7.396,15.783 -6.151,15.922 6.151,15.922 -7.652,16.213 7.652,16.213 -6.239,16.498 6.239,16.498 -8.001,16.68 8.001,16.68 -10,16.8 10,16.8 -5.826,16.977 -4.392,16.979 -1.492,16.979 1.508,16.979 4.408,16.979 5.826,16.977 -3,17 0,17 3,17 -8.388,17.054 8.388,17.054
WAKEUP: Left.1 U1.32 | length 10.2
  Top Layer w0.15: U1.32 -1.39,7.51 -1.39,8.06 -0.52,8.931 -0.52,10.804 -0.754,11.038 v1(-0.754,11.119)
  Bottom Layer w0.15: Left.1@-6.5,10.9 -6,10.9 -5.94,10.84 -5.139,10.84 -4.654,11.325 -2.46,11.325 -2.285,11.15 -1.414,11.15 -1.351,11.087 -0.786,11.087 v1(-0.754,11.119)
XTI: C5.1 U1.21 Y1.3 | length 4.8
  Top Layer w0.15: Y1.3 -4.675,12.375 -4.675,12.514 -4.51,12.679 -4.364,12.825 -4.1,12.825 -4.219,12.944 -4.289,12.944 C5.1 ; Y1.3@-4.646,12.542 -4.563,12.542 -4.475,12.63 -4.475,12.643 -4.343,12.775 -4.1,12.775 -3.357,12.775 -3.054,12.472 -3.054,11.974 -2.789,11.71 -2.41,11.71 U1.21
XTO: C4.1 U1.22 Y1.1 | length 3.1
  Top Layer w0.15: C4.1@-4.264,9.5 -4.264,10.236 -3.85,10.65 Y1.1 -3.85,10.75 -3.3,11.3 U1.22
pads on no net: U2. U3.

## Polygon pours and split planes (outlines as drawn)
no net on Top Solder (solid): -7.571,14.853 cw(c-7.571,16.078) -8.796,16.078 -8.795,17.528 cw(c-8.296,17.528) -8.296,18.028 -8.045,18.028 ccw(c-8.068,18.48) -7.617,18.503 -6.371,18.503 ccw(c-6.021,18.453) -6.071,18.103 -6.021,18.103 cw(c-6.021,17.342) -5.259,17.342 -5.3,15.804 -5.3,15.672 ccw(c-5.133,15.672) -5.133,15.505 -4.207,15.125 -1.431,13.988 cw(c-1.621,13.525) -1.81,13.063 -5.512,14.579 -5.697,14.655 -6.137,14.835 -6.121,14.853
no net on Top Solder (solid): 7.571,14.853 ccw(c7.571,16.078) 8.796,16.078 8.795,17.528 ccw(c8.296,17.528) 8.296,18.028 8.045,18.028 cw(c8.068,18.48) 7.617,18.503 6.371,18.503 cw(c6.021,18.453) 6.071,18.103 6.021,18.103 ccw(c6.021,17.342) 5.259,17.342 5.3,15.804 5.3,15.672 cw(c5.133,15.672) 5.133,15.505 4.207,15.125 1.431,13.988 ccw(c1.621,13.525) 1.81,13.063 5.512,14.579 5.697,14.655 6.137,14.835 6.121,14.853
VSS on Bottom Layer "VSS_L04_P009" (solid, pour order 9): -6.3,0.2 6.3,0.2 6.3,13.5 cw(c7,13.5) 7,14.2 10.8,14.2 10.8,17.4 -10.8,17.4 -10.8,14.2 -7.5,14.2 cw(c-7.5,13) -6.3,13
VSS on Internal Plane 1 "VSS_L02_P012" (solid, pour order 12): -6.3,0.2 6.3,0.2 6.3,13.5 cw(c7,13.5) 7,14.2 10.8,14.2 10.8,17.4 -10.8,17.4 -10.8,14.2 -7.5,14.2 cw(c-7.5,13) -6.3,13
3V3 on Internal Plane 2 "3V3_L03_P011" (solid, pour order 11): -6.3,0.2 6.3,0.2 6.3,13.5 cw(c7,13.5) 7,14.2 10.8,14.2 10.8,17.4 -10.8,17.4 -10.8,14.2 -7.5,14.2 cw(c-7.5,13) -6.3,13
VSS on Top Layer "VSS_L01_P013" (solid, pour order 13): -6.3,0.2 6.3,0.2 6.3,13.5 cw(c7,13.5) 7,14.2 10.8,14.2 10.8,17.4 -10.8,17.4 -10.8,14.2 -7.5,14.2 cw(c-7.5,13) -6.3,13

## Other copper
Top Layer:
  region net NetC1_2: -7.55,18.6 -6.45,18.6 -6.45,18.5 -7,16.4 -7.55,18.5
  region net NetC2_2: 6.45,18.6 7.55,18.6 7.55,18.5 7,16.4 6.45,18.5
  pour cut-out: -8.15,17.4 -5.85,17.4 -7,16.2
  pour cut-out: 8.15,17.4 5.85,17.4 7,16.2

## Silkscreen, mask and mechanical layers (free items; w line width, h text height)
Bottom Overlay:
  drawing of 32 lines, arcs and shapes, not listed
  text "Florian / Henzer" at 5.087,15.048 h1.52
  text "VSS" at 5.299,11.912 h1.2
  text "EXTON" at -2.659,11.811 h1.1
  text "VSS" at 5.299,10.52 h1.2
  text "WAKEUP" at -1.871,10.448 h1.1
  text "RSTn" at -3.353,9.072 h1.1
  text "IRQ/GPIO8" at 5.3,9.082 h1.2
  text "GPIO7" at -2.92,7.697 h1.1
  text "VSS" at 5.299,7.689 h1.2
  text "VDD1" at -3.301,6.343 h1.1
  text "SPICLK" at 5.3,6.297 h1.2
  text "3V3" at -3.924,4.977 h1.1
  text "SPIMISO" at 5.3,4.905 h1.2
  text "3V3" at -3.924,3.611 h1.1
  text "SPIMOSI" at 5.3,3.512 h1.2
  text "VSS" at -3.724,2.511 h1.1
  text "SPICSn" at 5.2,2.412 h1.2
  text "IO6" at -5.289,1.1 h1.1 r270
  text "IO5" at -3.903,1.1 h1.1 r270
  text "IO4" at -2.517,1.1 h1.1 r270
  text "IO3" at -1.132,1.1 h1.1 r270
  text "IO2" at 0.254,1.1 h1.1 r270
  text "IO1" at 1.64,1.1 h1.1 r270
  text "IO0" at 3.025,1.1 h1.1 r270
  text "VSS" at 5.699,1.11 h1
Mechanical 1:
  the board outline again, w0.1